# Altium PCB LM3150_BuckConverter.PcbDoc
Units mm, origin at the board's own origin, x right, y up, seen from the top; angles counter-clockwise.
Board outline 43.81 x 35.18 mm, 2 copper layers (Top Layer, Bottom Layer); 23 components, 13 nets, 73 pads, 52 vias.
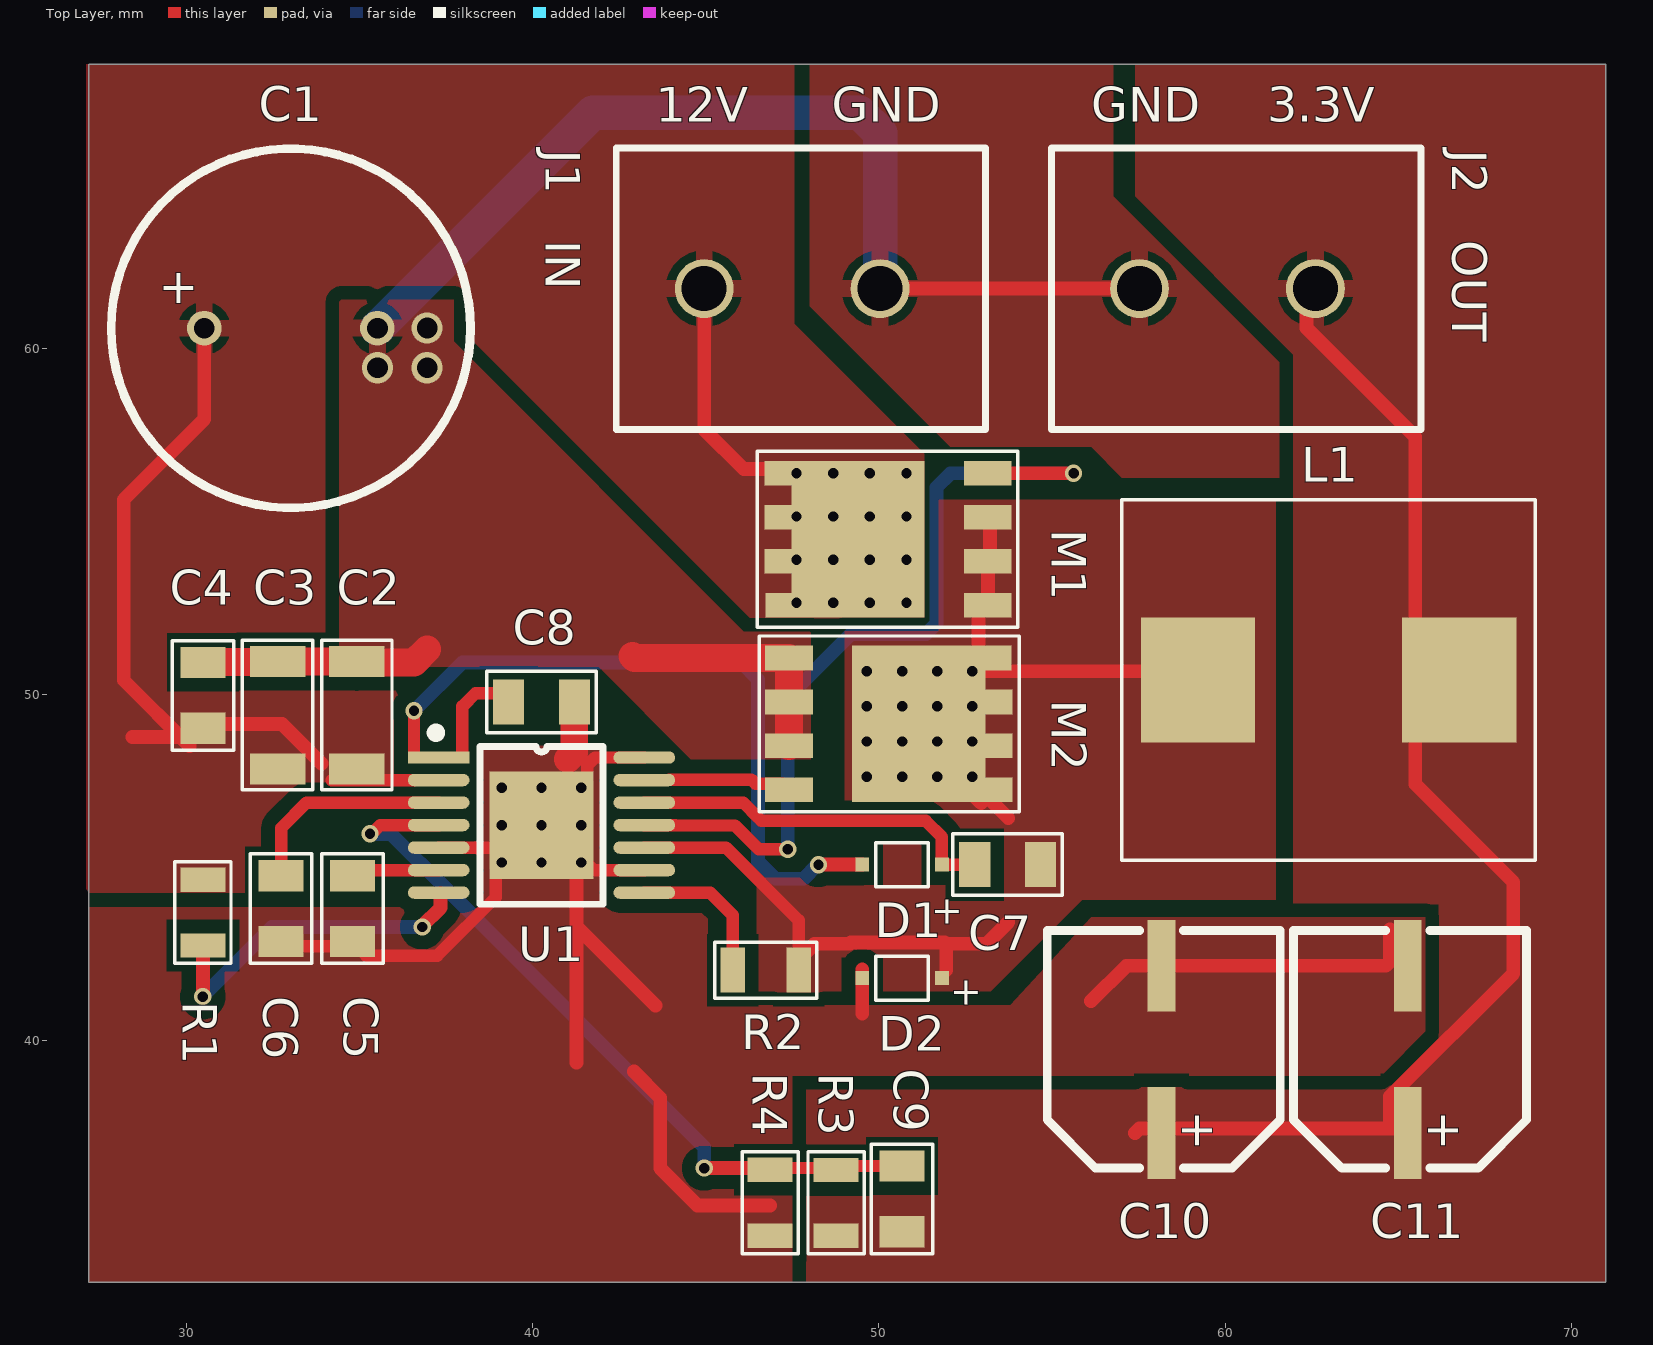
[diagram p0: Top Layer view]
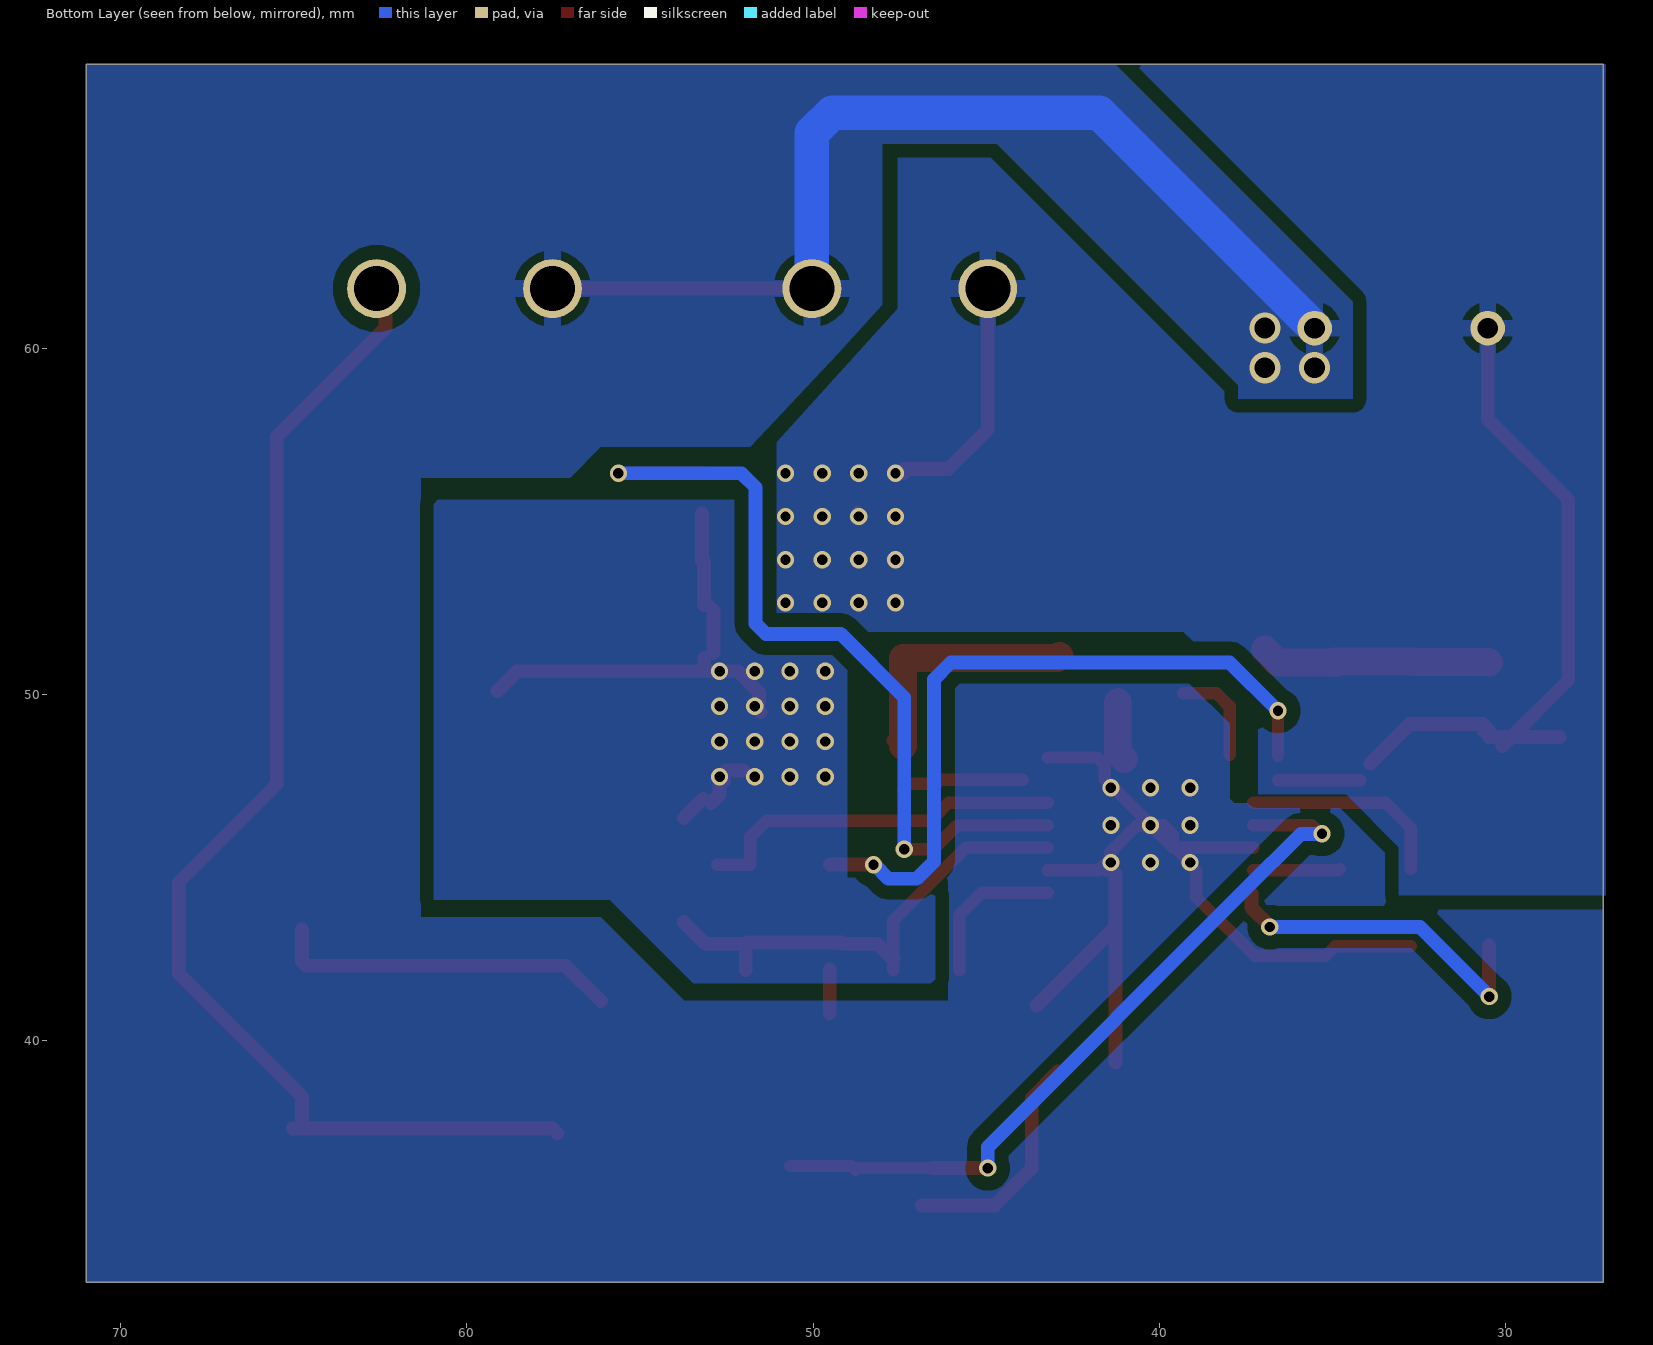
[diagram p1: Bottom Layer view, seen from below]
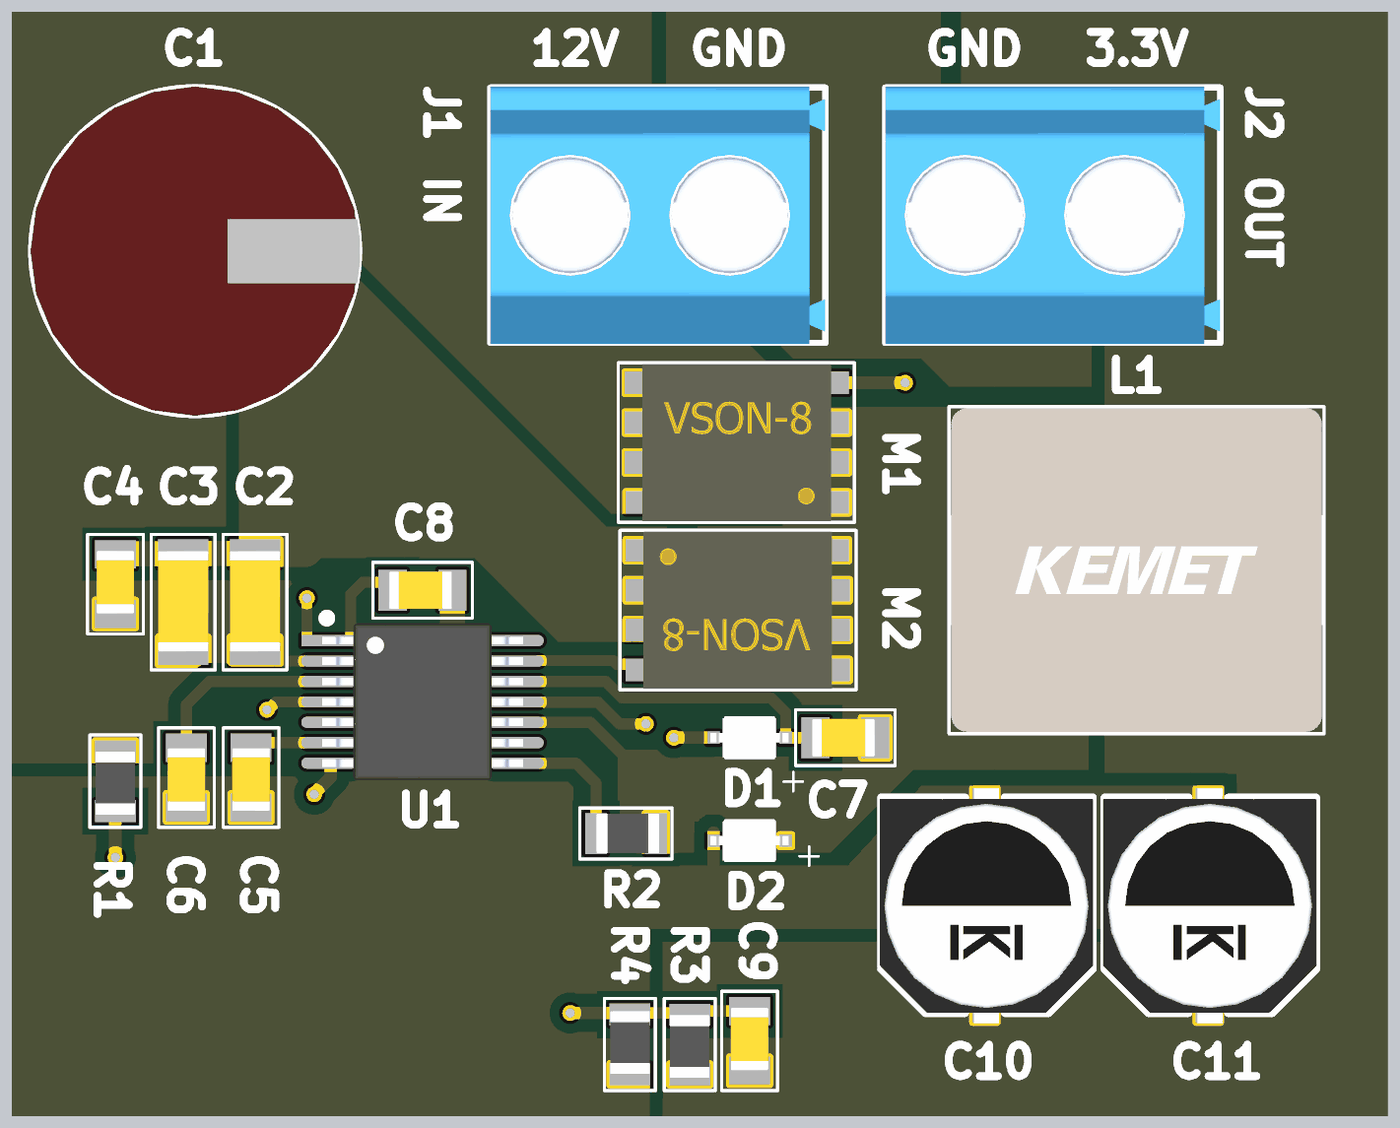
[diagram p2: 3D render of the assembled board from above, using the file's embedded part models]

## Layer stack, top to bottom
Top Solder: solder mask 0.0102, Solder Resist, Dk 3.5
Top Layer: signal copper 0.0356
Dielectric 1: dielectric 0.32, FR-4, Dk 4.8
Bottom Layer: signal copper 0.0356
Bottom Solder: solder mask 0.0102, Solder Resist, Dk 3.5

## Board outline
27.178,33.02 70.993,33.02 70.993,68.199 27.178,68.199

## Design rules (kind name [scope] priority, off if disabled: settings)
Clearance [All] p1: gap=0.4 ignorepadtopadclearanceinfootprint=FALSE except(0: Arc-Hole Track-Hole SMDPad-Hole THPad-Hole Via-Hole Fill-Hole Poly-Hole Region-Hole Text-Hole; 0.28: Arc-Arc Arc-Track Arc-SMDPad Track-Track Track-SMDPad SMDPad-SMDPad)
MinimumSolderMaskSliver [All] p1 off: minsoldermaskwidth=0.254
PolygonConnect [All] p1: thpad.connectstyle=Relief thpad.reliefconductorwidth=0.5 thpad.reliefentries=4 thpad.polygonreliefangle="90 Angle" thpad.airgapwidth=0.254 smdpad.connectstyle=Direct smdpad.reliefconductorwidth=0.254 smdpad.reliefentries=4 smdpad.polygonreliefangle="90 Angle" smdpad.airgapwidth=0.254 via.connectstyle=Direct via.reliefconductorwidth=0.254 via.reliefentries=4 via.polygonreliefangle="90 Angle" via.airgapwidth=0.254
RoutingPriority GND [InNet('GND')] p1: routingpriority=0
RoutingPriority RoutingPriority_1 [All] p2: routingpriority=0
RoutingVias [All] p1: holewidth=0.5 width=0.7 viastyle="Through Hole" minholewidth=0.3 minwidth=0.5 maxholewidth=0.711 maxwidth=1
SilkToSolderMaskClearance [IsPad] p1 off: minsilkscreentomaskgap=0.254 clearancetoexposedcopper=TRUE
SolderMaskExpansion [All] p1: expansion=0.102 istentingtop=FALSE
Width [All] p1: maxlimit=1 minlimit=0.356 preferedwidth=0.4
27 further rules are at their usual default settings.

## Components (designator, comment, footprint, x,y, rotation, side; value= is the part's Value field where it differs from the comment)
C1 "Cin1" Cap860010675016 33.02,60.579 r0 top value=150uF
C2 "" C1206 34.925,49.403 r270 top value=10uF
C3 "Cin3" C1206 32.639,49.403 r270 top value=10uF
C4 "Cbyp" C0805 30.48,49.977 r270 top value=0.1uF
C5 "Css" C0805 34.798,43.815 r90 top value=0.068uF
C6 "Cen" C0805 32.741,43.815 r90 top value=1000pF
C7 "Cbst" C0805 53.721,45.085 r0 top value=0.47uF
C8 "Cvcc" C0805 40.259,49.784 r0 top value=4.7uF
C9 "Cff" C0805 50.673,35.433 r270 top value=150pF
C10 "Co1" A765EB157M0JLAE020 58.166,39.751 r270 top value=150uF
C11 "Co2" A765EB157M0JLAE020 65.278,39.751 r270 top value=150uF
D1 "Dbst" CUS08F30 50.673,45.085 r0 top
D2 "Schottky" CUS08F30 50.673,41.807 r0 top
J1 "Input" TB006-508-02BE 47.498,61.722 r0 top
J2 "Output" TB006-508-02BE 60.071,61.722 r0 top
L1 "Coil" MPCV1060L1R0 62.992,50.419 r0 top value=1uH
M1 "Mosfet" CSD18540Q5B 50.266,54.483 r180 top
M2 "Mosfet" CSD18540Q5B 50.292,49.149 r0 top
R1 "Ron" R0805 30.48,43.701 r90 top value=56.2Kohm
R2 "Rlim" R0805 46.736,42.037 r180 top value=1.91Kohm
R3 "Rfb2" R0805 48.768,35.315 r90 top value=22.6Kohm
R4 "Rfb1" R0805 46.863,35.321 r270 top value=4.99Kohm
U1 "LM3150MH/NOPB" LM3150MH/NOPB 40.259,46.228 r0 top

## Footprints (in the part's own frame and the unit in brackets; to place one, negate y for a bottom-side part, rotate by r counter-clockwise, add the part's x,y. Pads: shape width x height; smd on the part's side, far side on the other; paste and mask are expansions set on the pad)
A765EB157M0JLAE020 [mm]
  rect 2.65x0.8 smd: 1(2.413,0) 2(-2.413,0)
  silkscreen extent -3.43,-3.3 3.43,3.43, body extent -3.73,-3.35 3.77,3.45, height 6
C0805 [mm]
  rect 0.9x1.3 smd: 1(-0.95,0) 2(0.95,0)
  silkscreen extent -1.58,-0.89 1.58,0.89, body extent -1.06,-0.6 0.94,0.6, height 1
C1206 [mm]
  rect 0.9x1.6 smd: 1(-1.55,0) 2(1.55,0)
  silkscreen extent -2.16,-1.02 2.16,1.02, body extent -1.63,-0.8 1.57,0.8, height 1
Cap860010675016 [mm]
  round 1 hole 0.6: 1(-2.5,0) 2(2.5,0)
  silkscreen extent -5.19,-5.18 5.19,5.18, body extent -5.25,-5.24 5.25,5.24, height 12.51
CSD18540Q5B [mm]
  rect 1.372x0.71 smd: 1(-2.885,1.905) 1(-2.885,-0.635) 1(-2.885,0.635) 2(-2.885,-1.905) 3(2.857,1.905) 3(2.885,-0.635) 3(2.885,0.635) 3(2.885,-1.905)
  rect 3.85x4.52 smd: 3(0.863,0)
  silkscreen extent -3.75,-2.54 3.77,2.54, body extent -3,-2.5 3,2.5, height 1
CUS08F30 [mm]
  rect 0.4x0.4 smd: 1(-1.15,0) 2(1.15,0)
  silkscreen extent -0.76,-0.64 0.76,0.64, body extent -1.26,-0.62 1.24,0.63, height 0.9
LM3150MH/NOPB [mm]
  rect 1.78x0.356 smd: 1(-2.97,1.95)
  oval 1.78x0.356 smd: 2(-2.97,1.3) 3(-2.97,0.65) 4(-2.97,0) 5(-2.97,-0.65) 6(-2.97,-1.3) 7(-2.97,-1.95) 8(2.97,-1.95) 9(2.97,-1.3) 10(2.97,-0.65) 11(2.97,0) 12(2.97,0.65) 13(2.97,1.3) 14(2.97,1.95)
  rect 3x3.1 smd: 5(0,0)
  silkscreen extent -3.17,-2.29 1.78,2.79, body extent -3.2,-2.5 3.2,2.5, height 1.2
MPCV1060L1R0 [mm]
  rect 3.3x3.6 smd: 1(-3.775,0) 2(3.775,0)
  silkscreen extent -5.97,-5.21 5.97,5.21, body extent -6,-5.14 6,5.16, height 6
R0805 [mm]
  rect 0.7x1.3 smd: 1(-0.95,0) 2(0.95,0)
  silkscreen extent -1.47,-0.81 1.47,0.81, body extent -1.06,-0.62 0.94,0.63, height 0.6
TB006-508-02BE [mm]
  round 1.7 hole 1.3: 1(-2.54,0) 2(2.54,0)
  silkscreen extent -5.08,-4.06 5.59,4.06, body extent -5.08,-4.1 5.58,4.1, height 10

## Part data
C1: library part Polarized_Cap, "CAP ALUM 150UF 20% 63V RADIAL", Manufacturer="Würth Elektronik", Manufacturer part number=860010675016
C2 C3: library part Capacitor, "CAP CER 10UF 25V X7R 1206", Manufacturer="Samsung Electro-Mechanics", Manufacturer part number=CL31B106KAHVPNE
C4: library part Capacitor, "CAP CER 0.1UF 50V X7R 0805", Manufacturer="AVX Corporation", Manufacturer part number=08055C104KAT2A
C5: library part Capacitor, "CAP CER 0.068UF 25V X7R 0805", Manufacturer=YAGEO, Manufacturer part number=CC0805KRX7R8BB683
C6: library part Capacitor, "CAP CER 1000PF 50V X7R 0805", Manufacturer="Samsung Electro-Mechanics", Manufacturer part number=CL21B102KBCNNNC
C7: library part Capacitor, "CAP CER 0.47UF 16V X7R 0805", Manufacturer="Samsung Electro-Mechanics", Manufacturer part number=CL21B474KOFNNNE
C8: library part Capacitor, "CAP CER 4.7UF 16V X7R 0805", Manufacturer="Taiyo Yuden", Manufacturer part number=EMK212B7475KG-T
C9: library part Capacitor, "CAP CER 150PF 50V C0G/NPO 0805", Manufacturer=YAGEO, Manufacturer part number=CC0805JRNPO9BN151
C10 C11: library part Polarized_Cap, "CAP ALUM POLY 150UF 20% 6.3V SMD", Manufacturer=KEMET, Manufacturer part number=A765EB157M0JLAE020
D1: library part Schottky, "DIODE SCHOTTKY 30V 800MA USC", Manufacturer="Toshiba Semiconductor and Storage", Manufacturer part number=CUS08F30,H3F
D2: "DIODE SCHOTTKY 30V 800MA USC", Manufacturer="Toshiba Semiconductor and Storage", Manufacturer part number=CUS08F30,H3F
J1 J2: library part Terminal_Block, "TERMINAL BLOCK, SCREW TYPE, 5.08", Manufacturer="CUI Devices", Manufacturer part number=TB006-508-02BE
L1: "FIXED IND 1UH 26A 1.87 MOHM SMD", Manufacturer=KEMET, Manufacturer part number=MPCV1060L1R0
M1 M2: "MOSFET N-CH 60V 100A 8VSON", Manufacturer="Texas Instruments", Manufacturer part number=CSD18540Q5B
R1: library part Resistor, "RES 56.2K OHM 1% 1/8W 0805", Manufacturer="Stackpole Electronics Inc", Manufacturer part number=RMCF0805FT56K2
R2: library part Resistor, "RES SMD 1.91K OHM 1% 1/8W 0805", Manufacturer=YAGEO, Manufacturer part number=RC0805FR-071K91L
R3: library part Resistor, "RES SMD 22.6K OHM 1% 1/8W 0805", Manufacturer="Vishay Dale", Manufacturer part number=CRCW080522K6FKEA
R4: library part Resistor, "RES 4.99K OHM 1% 1/8W 0805", Manufacturer="Stackpole Electronics Inc", Manufacturer part number=RMCF0805FT4K99
U1: "IC REG CTRLR BUCK 14TSSOP", Manufacturer="Texas Instruments", Manufacturer part number=LM3150MHNOPB

## Via types
v1: diameter 0.5, hole 0.3, Top Layer to Bottom Layer, 49 vias
v2: diameter 0.9, hole 0.6, Top Layer to Bottom Layer, 3 vias

## Nets (pads, with @x,y where several pads share a name; then routed paths per layer and width w, separated by ;. In a path a pad name is that pad's centre, name@x,y a point inside that pad or via, vN(x,y) a via of type N, cw(c..) or ccw(c..) an arc to the next point about the centre after c; other vN are vias at no path point)
+3.3: C9.2 C10.1 C11.1 J2.2 L1.2 R3.1 | length 42.8
  Top Layer w0.4: 57.404,37.338 57.531,37.465 C10.1@57.912,37.465 ; J2.2 62.357,61.468 62.357,60.579 65.496,57.44 65.496,50.419 65.496,47.407 68.326,44.577 68.326,41.946 64.77,38.39 64.77,37.465 ; C11.1@65.024,37.465 64.77,37.465 ; C10.1@57.912,37.465 64.77,37.465 ; C10.1@57.912,37.465 64.77,37.465
+12: C1.1 C2.2 C3.2 C4.2 J1.1 M1.3 R1.2 U1.2 | length 29.8
  Top Layer w0.356: C2.2@34.206,47.528 U1.2@36.576,47.528
  Top Layer w0.4: 28.441,48.768 C4.2@30.48,48.768 ; 30.092,48.514 28.194,50.412 28.194,55.626 30.52,57.952 C1.1 ; C4.2@30.644,48.961 30.48,48.961 30.668,49.149 32.766,49.149 33.909,48.006 ; J1.1 44.958,57.658 46.101,56.515 M1.3@47.381,56.515 ; M1.3@47.381,56.388 47.583,56.388 M1.3@47.625,56.346 ; M1.3@48.715,55.255 48.715,55.118 M1.3@48.768,55.118
  other v1: 47.625,52.646 48.683,52.646 49.742,52.646 50.8,52.646 47.625,53.894 48.683,53.894 49.742,53.894 50.8,53.894 47.625,55.141 48.683,55.141 49.742,55.141 50.8,55.141 47.625,56.388 48.683,56.388 49.742,56.388 50.8,56.388
GND: C1.2 C2.1 C3.1 C4.1 C5.1 C6.1 C8.2 C10.2 C11.2 D2.1 J1.2 J2.1 M2.1 R4.2 U1.5 U1.9 U1.14 | length 92.7
  Top Layer w0.356: C6.1@32.741,42.725 34.925,42.725 35.197,42.453 37.245,42.453 38.937,44.145 38.937,44.906 U1.5@39.148,45.117 ; U1.5@37.289,45.578 U1.5@39.545,45.578 ; v1(39.116,45.148) U1.5@39.545,45.578 ; U1.5@40.355,46.332 41.331,47.307 U1.5@41.338,47.307 ; U1.5@40.359,46.328 v1(40.259,46.228) ; U1.5@41.335,47.304 U1.5@41.338,47.307 ; v1(41.402,45.148) 41.428,45.174 41.428,45.44 40.64,46.228 v1(40.259,46.228) ; v1(41.402,47.307) U1.5@41.338,47.307 ; U1.5@41.613,45.074 41.759,44.928 U1.9 ; U1.14 41.805,48.178 41.581,47.954 41.581,47.55 U1.5@41.338,47.307 ; U1.5@39.545,45.578 U1.5@39.609,45.578 ; U1.5@39.609,45.578 v1(40.259,46.228) ; U1.5@39.609,45.578 39.609,45.946 39.9,46.237 39.909,46.228 v1(40.259,46.228)
  Top Layer w0.4: 41.275,39.37 41.275,43.302 ; U1.5@41.275,44.831 41.275,43.302 ; v1(41.402,45.148) 41.545,45.006 U1.5@41.545,44.942 ; 42.926,39.116 43.688,38.354 43.688,36.322 44.765,35.245 46.863,35.245 ; 43.556,41.021 41.275,43.302 ; M2.1@47.407,48.514 47.532,48.514 M2.1@47.687,48.669 ; 49.523,40.791 49.523,42.061 ; J1.2 J2.1 ; 56.134,41.148 57.15,42.164 C10.2 64.643,42.164 64.77,42.291 64.77,43.216
  Top Layer w0.8: C4.1 30.493,50.94 32.626,50.94 C3.1 C2.1 ; C2.1@34.925,50.903 34.949,50.927 36.576,50.927 36.957,51.308 ; 41.021,48.133 41.209,48.321 C8.2 ; 42.885,51.114 42.945,51.054 47.407,51.054 47.407,49.784 M2.1@47.407,48.514
  Bottom Layer w1: C1.2 41.743,66.802 49.452,66.802 50.038,66.216 J1.2
  other v1: 40.259,45.148 39.116,46.228 41.402,46.228 39.116,47.307 40.259,47.307
  other v2: 35.526,59.436 36.957,59.436 36.957,60.585
NetC5_2: C5.2 U1.6 | length 2.5
  Top Layer w0.356: C5.2@34.798,44.958 34.828,44.928 U1.6
NetC6_2: C6.2 U1.3 | length 6
  Top Layer w0.356: C6.2@32.741,44.958 32.741,46.146 33.472,46.878 U1.3
NetC7_1: C7.1 D1.2 U1.12 | length 10.6
  Top Layer w0.356: U1.12 46.085,46.878 46.532,46.431 46.533,46.431 46.609,46.355 51.353,46.355 51.823,45.885 D1.2@51.823,45.212 ; D1.2 C7.1
NetC7_2: C7.2 D2.2 L1.1 M1.1 M2.3 R2.1 U1.10 | length 29.9
  Top Layer w0.356: U1.10 45.586,45.578 47.686,43.478 47.686,42.337 R2.1
  Top Layer w0.4: R2.1@47.686,42.337 48.148,42.799 49.163,42.799 49.201,42.837 51.905,42.837 51.943,42.799 ; M2.3@51.52,49.488 v1(51.689,49.657) 51.562,49.784 51.562,50.059 52.176,50.673 v1(52.705,50.673) 53.149,50.673 ; 51.95,42.037 51.95,42.792 51.943,42.799 ; M2.3@52.013,47.809 52.521,47.809 v1(52.705,47.625) 52.578,47.498 52.592,47.498 52.712,47.378 52.712,47.11 52.959,46.863 ; M2.3@52.88,51.209 52.88,52.423 53.035,52.578 53.15,52.578 M1.1@53.15,53.848 ; M2.3@53.149,51.054 53.149,50.673 ; M2.3@53.177,46.99 53.741,46.425 ; M1.1@53.213,53.848 M1.1@53.213,55.233 ; 53.741,43.434 53.106,42.799 51.943,42.799 ; L1.1@59.118,50.102 58.547,50.673 53.149,50.673
  other v1: 49.657,47.625 50.673,47.625 51.689,47.625 49.657,48.641 50.673,48.641 51.689,48.641 52.705,48.641 49.657,49.657 50.673,49.657 52.705,49.657 49.657,50.673 50.673,50.673 51.689,50.673
NetC8_1: C8.1 D1.1 U1.1 | length 23.5
  Top Layer w0.356: U1.1@36.576,48.229 v1(36.576,49.53) ; U1.1@37.973,48.26 37.973,49.657 38.354,50.038 C8.1@39.309,50.038
  Top Layer w0.4: v1@48.287,45.085 D1.1
  Bottom Layer w0.4: v1(36.576,49.53) 37.973,50.927 46.029,50.927 46.517,50.439 46.517,45.179 47.019,44.677 47.825,44.677 48.233,45.085 v1(48.26,45.085)
NetC9_1: C9.1 R3.2 R4.1 U1.4 | length 21.9
  Top Layer w0.356: v1(35.306,45.974) 35.347,45.974 35.601,46.228 U1.4 ; R4.1@46.548,36.322 48.711,36.322 R3.2 48.886,36.383 C9.1
  Top Layer w0.4: v1@44.987,36.322 R4.1@46.548,36.322
  Bottom Layer w0.4: v1(35.306,45.974) 35.914,45.974 37.553,44.335 44.958,36.93 v1(44.958,36.322)
NetM1_2: M1.2 U1.11 | length 24.5
  Top Layer w0.356: U1.11 44.129,46.228 44.143,46.214 45.849,46.214 46.117,45.946 46.119,45.946 46.538,45.527 v1(47.371,45.527)
  Top Layer w0.4: M1.2 v1(55.626,56.388)
  Bottom Layer w0.4: v1(47.371,45.527) 47.371,49.911 49.204,51.744 51.363,51.744 51.667,52.048 51.667,55.985 52.07,56.388 v1(55.626,56.388)
NetM2_2: M2.2 U1.13 | length 3.6
  Top Layer w0.356: U1.13@43.942,47.542 46.32,47.542 46.441,47.421 47.23,47.421 M2.2
NetR1_1: R1.1 U1.7 | length 9.8
  Top Layer w0.4: v1(30.48,41.275) R1.1 ; v1(36.813,43.285) 36.813,43.314 37.338,43.839 U1.7@37.338,44.256
  Bottom Layer w0.4: v1@30.48,41.294 32.471,43.285 v1(36.813,43.285)
NetR2_2: R2.2 U1.8 | length 4.4
  Top Layer w0.356: U1.8 45.13,44.278 45.786,43.622 R2.2

## Polygon pours and split planes (outlines as drawn)
NetC7_2 on Top Layer "NETC7_2_L01_P007" (solid, pour order 7): 61.468,55.626 61.468,44.069 55.88,44.069 53.213,41.402 46.482,41.402 46.482,44.704 49.022,44.704 49.022,55.626
+12 on Top Layer "+12_L01_P015" (solid, pour order 15): 27.115,68.199 47.562,68.199 47.562,60.706 51.308,56.96 51.308,52.197 38.481,52.197 37.148,50.864 37.148,46.99 34.481,46.99 33.084,45.593 33.084,44.069 27.115,44.069 27.115,44.323 27.115,44.45 27.115,68.326
GND on Top Layer "GND_L01_P013" (solid, pour order 13): 41.91,50.8 34.417,50.8 34.417,51.117 34.417,61.341 34.48,61.404 37.719,61.404 37.719,60.198 46.101,51.816 48.006,51.816 48.041,51.781 48.041,48.133 44.577,48.133
GND on Top Layer "GND_L01_P002" (solid, pour order 2): 42.037,48.514 42.1,48.451 42.1,43.861 45.055,43.861 45.055,41.021 53.805,41.021 56.144,43.561 65.786,43.561 65.786,38.989 47.498,38.989 47.498,33.02 27.178,33.02 27.178,43.861 37.338,43.861 37.338,48.514
GND on Top Layer "GND_L01_P018" (solid, pour order 18): 48.006,68.199 48.006,61.214 52.07,57.15 56.134,57.15 57.023,56.261 61.595,56.261 61.595,59.563 56.769,64.389 56.769,68.199
+3.3 on Top Layer "+3.3_L01_P003" (solid, pour order 3): 61.976,43.942 66.167,43.942 66.167,39.878 64.985,38.696 47.879,38.696 47.879,33.02 70.993,33.02 70.993,68.199 57.404,68.199 57.404,64.389 61.976,59.817
GND on Bottom Layer "GND_L02_P017" (solid, pour order 17): 57.023,56.261 61.341,56.261 61.341,52.579 61.341,52.578 61.341,43.561 56.134,43.561 53.721,41.148 46.101,41.148 46.101,44.577 46.228,44.577 47.879,46.228 47.879,51.435 40.259,51.435 37.973,49.149 37.973,46.99 37.846,46.863 34.925,46.863 31.877,43.815 27.178,43.815 27.178,33.02 70.993,33.02 70.993,68.199 48.006,68.199 48.006,61.214 51.816,57.15 56.134,57.15
+12 on Bottom Layer "+12_L02_P008" (solid, pour order 8): 27.115,68.199 47.562,68.199 47.562,61.144 51.054,57.29 51.054,51.816 39.307,51.816 37.148,49.657 37.148,47.117 34.608,47.117 33.084,45.593 33.084,44.196 27.115,44.196 27.115,44.323 27.115,44.45 27.115,68.326
GND on Bottom Layer "GND_L02_P005" (solid, pour order 5): 37.719,58.928 37.719,58.547 34.417,58.547 34.417,61.341 41.275,68.199 48.133,68.199 48.133,65.913 44.704,65.913
NetC7_2 on Bottom Layer "NETC7_2_L02_P012" (solid, pour order 12): 60.96,55.499 60.96,44.069 55.88,44.069 53.467,41.656 46.609,41.656 46.482,41.783 46.482,44.704 49.022,44.704 49.022,55.626 60.848,55.626

## Silkscreen, mask and mechanical layers (free items; w line width, h text height)
Top Overlay:
  text "12V" at 43.561,66.548 h1
  text "GND" at 48.641,66.548 h1
  text "GND" at 56.134,66.548 h1
  text "3.3V" at 61.214,66.548 h1
  text "IN" at 40.386,63.119 h1 r270
  text "OUT" at 66.556,63.119 h1 r270

## Text inside footprints (layer, text, board x,y; h text height)
C1: Top Overlay "+" at 29.21,61.301 h1
C10: Top Overlay "+" at 58.761,37.973 h1 r270
C11: Top Overlay "+" at 65.873,37.973 h1 r270
D1: Top Overlay "+" at 51.515,43.381 h0.8
D2: Top Overlay "+" at 52.07,41.045 h0.8